# Altium PCB PCB1.PcbDoc
Units mm, origin at the board's own origin, x right, y up, seen from the top; angles counter-clockwise.
Board outline 85.6 x 53.97 mm, 2 copper layers (Top Layer, Bottom Layer), stack 1.97 mm thick; 50 components, 33 nets, 235 pads, 45 vias.
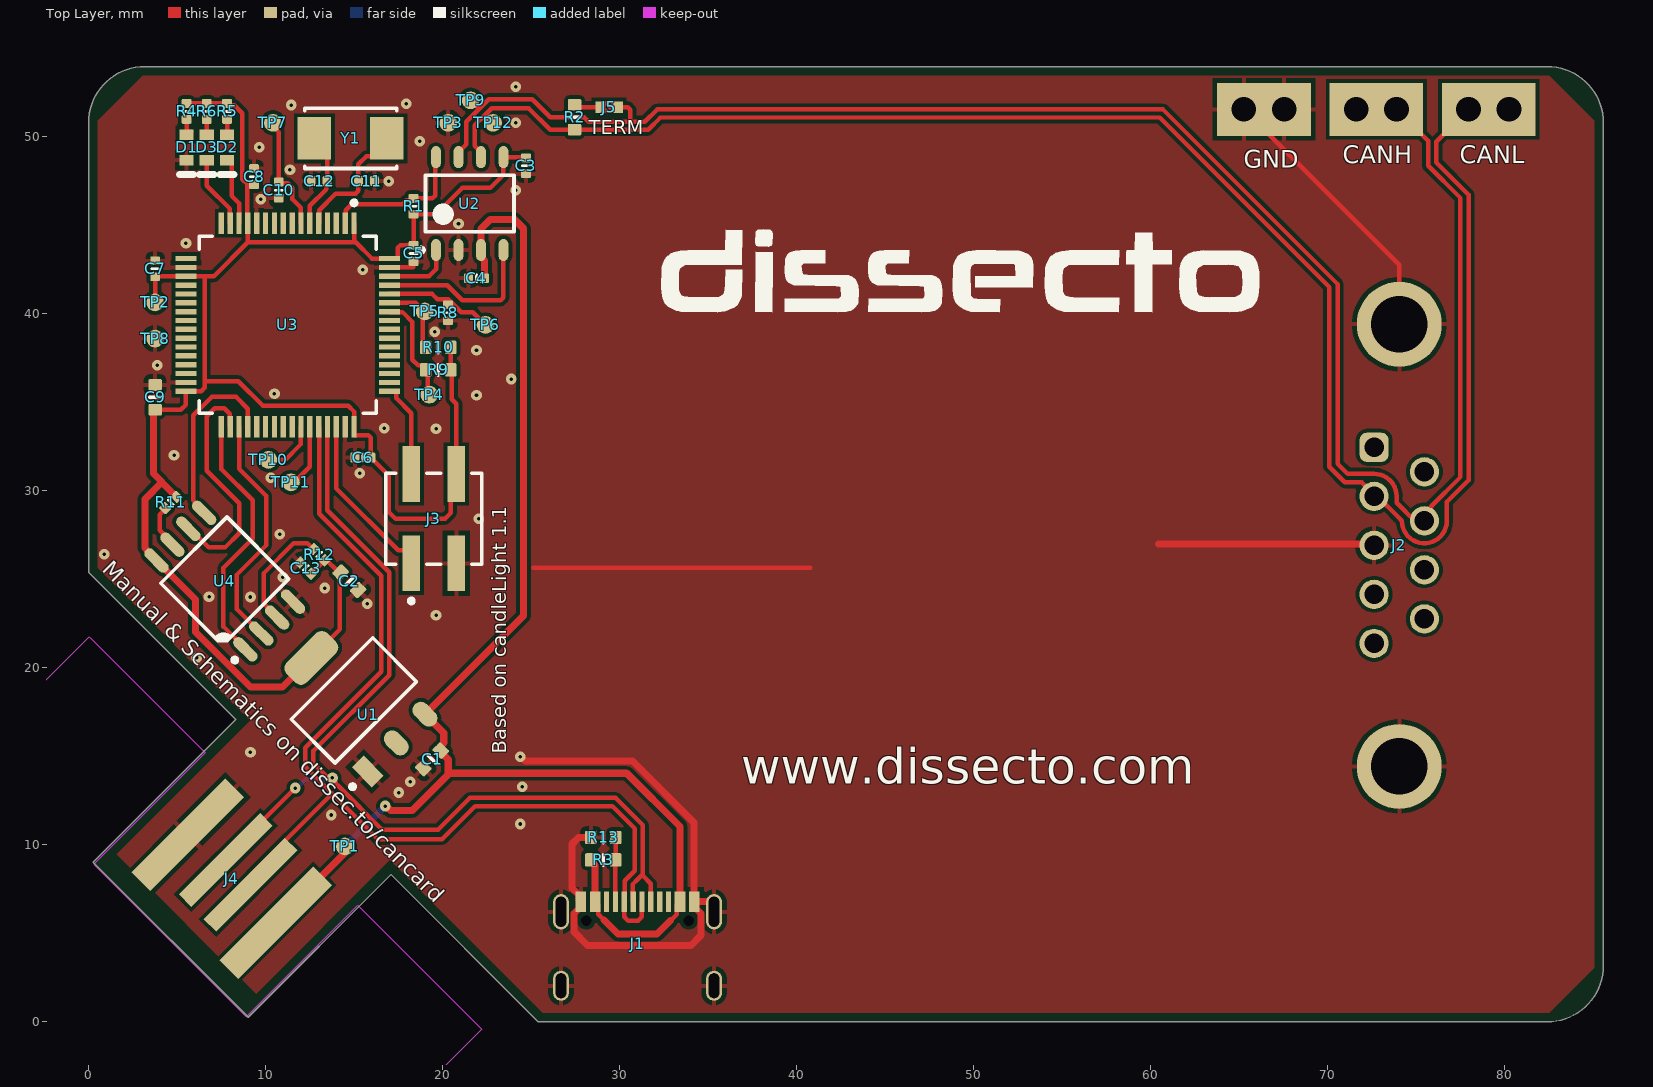
[diagram p0: Top Layer view]
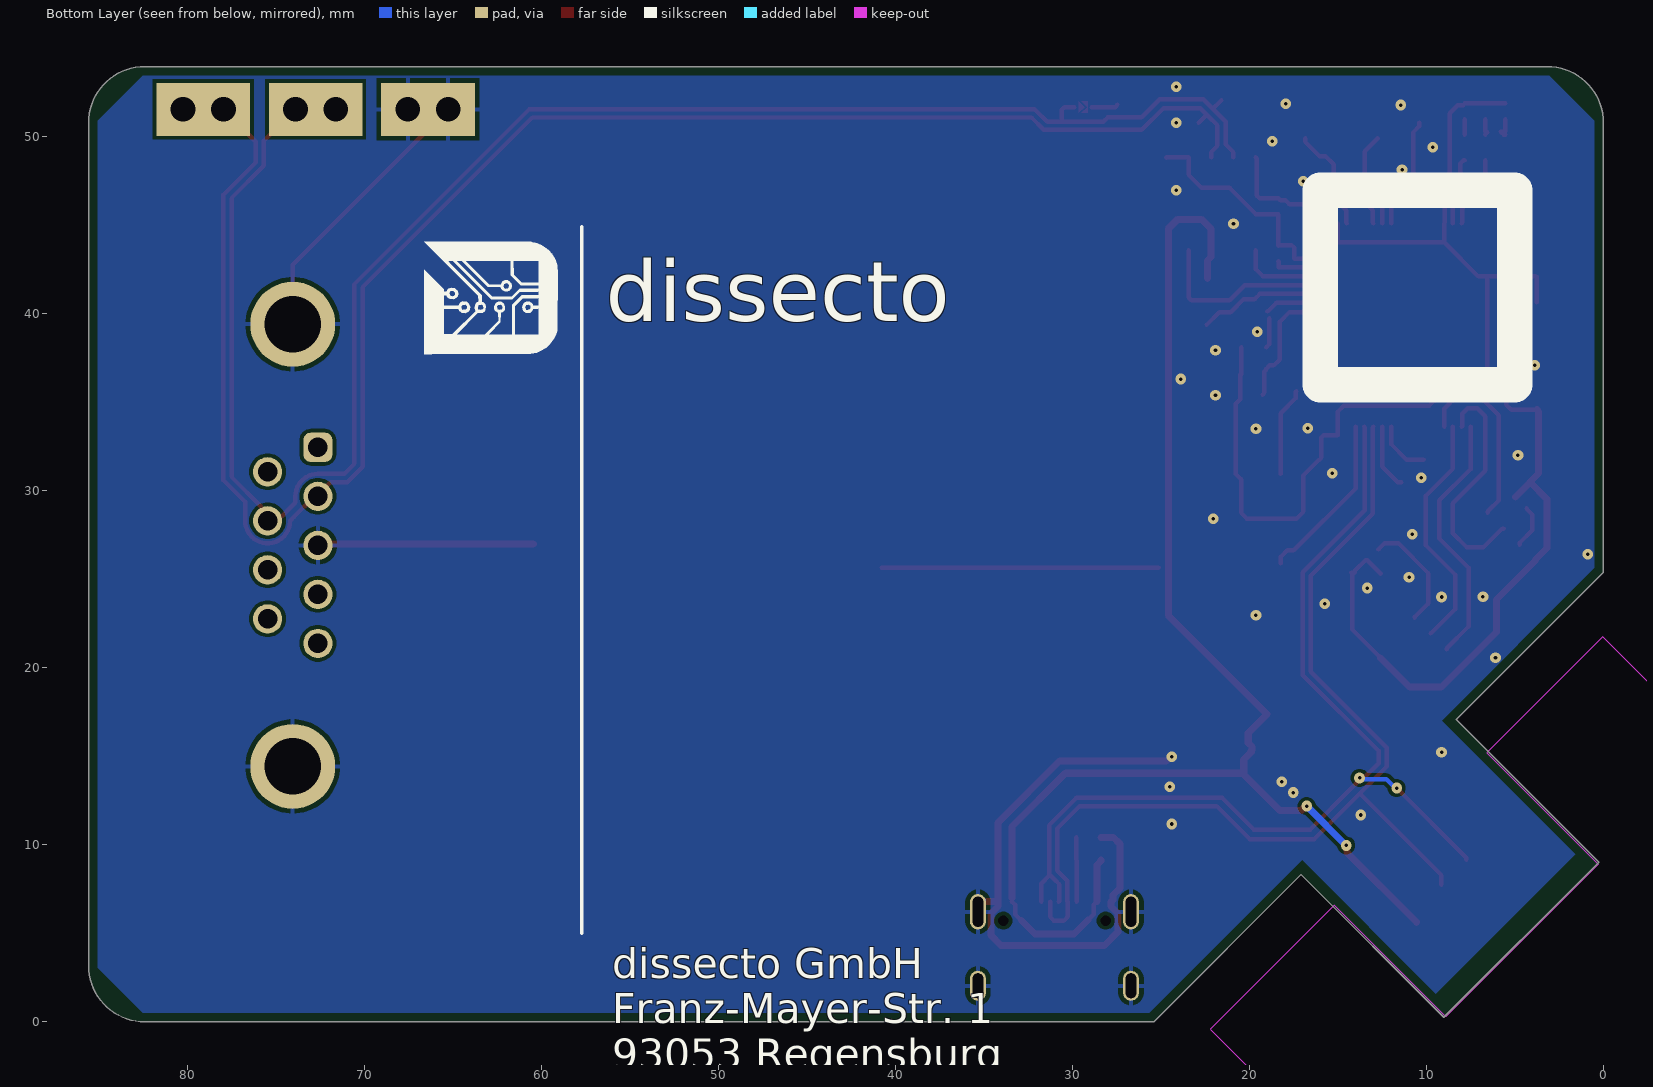
[diagram p1: Bottom Layer view, seen from below]
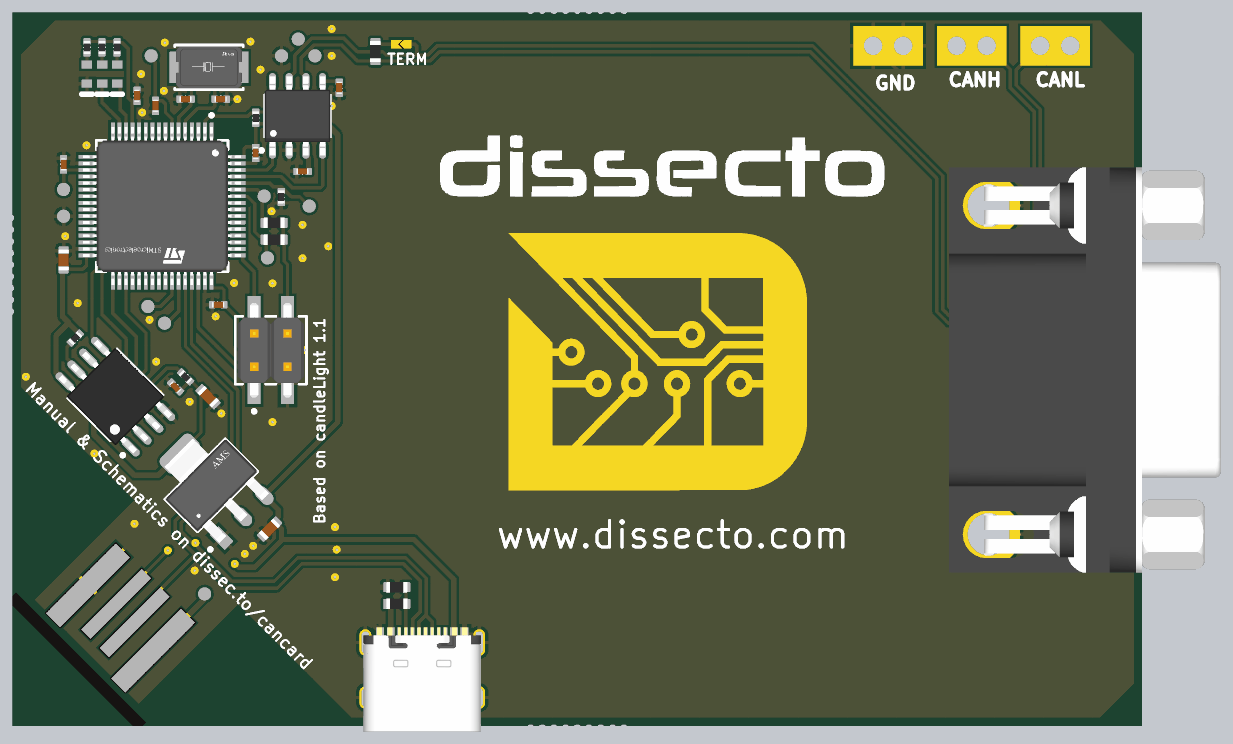
[diagram p2: 3D render of the assembled board from above, using the file's embedded part models]

## Layer stack, top to bottom
Top Solder: solder mask 0.0102, Solder Resist, Dk 3.5
Top Layer: signal copper 0.035
Dielectric 1: dielectric 1.9, FR-4, Dk 4.8
Bottom Layer: signal copper 0.035
Bottom Solder: solder mask 0.0102, Solder Resist, Dk 3.5

## Board outline
9.017,0.254 0.254,9.017 8.319,17.081 0,25.4 0,50.8 cw(c3.175,50.8) 3.175,53.975 82.423,53.975 cw(c82.423,50.8) 85.598,50.8 85.598,3.175 cw(c82.423,3.175) 82.423,0 25.4,0 17.081,8.319

## Design rules (kind name [scope] priority, off if disabled: settings)
Clearance [All] p1: gap=0.2 ignorepadtopadclearanceinfootprint=TRUE
DiffPairsRouting [All] p1: maxlimit=0.254 minlimit=0.2 mostfreqgap=0.254 toplayer_minwidth=0.2 toplayer_maxwidth=0.381 toplayer_prefwidth=0.381 bottomlayer_minwidth=0.2 bottomlayer_maxwidth=0.381 bottomlayer_prefwidth=0.381 maxuncoupledlength=12.7
HoleSize [All] p1: absolutevalues=TRUE maxlimit=100 minlimit=0.025 maxpercent=80.000 minpercent=20.000
MinimumSolderMaskSliver [All] p1: minsoldermaskwidth=0.1
PlaneConnect [All] p1: pad.planeconnectstyle=Relief pad.reliefexpansion=0.508 pad.reliefentries=4 pad.reliefconductorwidth=0.254 pad.reliefairgap=0.254 via.planeconnectstyle=Direct via.reliefexpansion=0.508 via.reliefentries=4 via.reliefconductorwidth=0.254 via.reliefairgap=0.254
PolygonConnect [All] p1: thpad.connectstyle=Relief thpad.reliefconductorwidth=0.254 thpad.reliefentries=4 thpad.polygonreliefangle="90 Angle" thpad.airgapwidth=0.254 smdpad.connectstyle=Relief smdpad.reliefconductorwidth=0.254 smdpad.reliefentries=4 smdpad.polygonreliefangle="90 Angle" smdpad.airgapwidth=0.254 via.connectstyle=Direct via.reliefconductorwidth=0.254 via.reliefentries=4 via.polygonreliefangle="90 Angle" via.airgapwidth=0.254
RoutingVias [All] p1: holewidth=0.711 width=1.27 viastyle="Through Hole" minholewidth=0.711 minwidth=1.27 maxholewidth=0.711 maxwidth=1.27
SilkToSilkClearance [All] p1: silktosilkclearance=0
SilkToSolderMaskClearance [IsPad] p1: minsilkscreentomaskgap=0 clearancetoexposedcopper=TRUE
SolderMaskExpansion [IsVia] p1: expansion=-1000 istentingtop=FALSE
Width [All] p1: maxlimit=2 minlimit=0.254 preferedwidth=0.254 minimp=50.000000 maximp=50.000000 favimp=50.000000
24 further rules are at their usual default settings.

## Classes and differential pairs
differential pair CAN: +CAN_P -CAN_N
differential pair MCU_USB: +MCU_USB_P -MCU_USB_N

## Components (designator, comment, footprint, x,y, rotation, side; value= is the part's Value field where it differs from the comment)
C1 "Capacitor" CAPC0603(1608)100_L 19.404,14.832 r45 top value=10uF
C2 "Capacitor" CAPC0603(1608)100_L 14.732,24.892 r135 top value=10uF
C3 "Capacitor" CAPC0402(1005)33_L 24.712,48.369 r90 top value=100nF
C4 "Capacitor" CAPC0402(1005)33_L 21.918,42.019 r0 top value=100nF
C5 "Capacitor" CAPC0402(1005)33_L 18.362,43.416 r90 top value=100nF
C6 "Capacitor" CAPC0402(1005)33_L 15.503,31.886 r0 top value=100nF
C7 "Capacitor" CAPC0402(1005)33_L 3.757,42.554 r270 top value=100nF
C8 "Capacitor" CAPC0402(1005)33_L 9.345,47.761 r270 top value=100nF
C9 "Capacitor" CAPC0603(1608)100_L 3.757,35.288 r270 top value=10uF
C10 "Capacitor" CAPC0402(1005)33_L 10.742,46.999 r90 top value=100nF
C11 "Capacitor" CAPC0402(1005)33_L 15.695,47.507 r180 top value=20pF
C12 "Capacitor" CAPC0402(1005)33_L 13.025,47.507 r0 top value=20pF
C13 "Capacitor" CAPC0402(1005)33_L 12.266,25.636 r315 top value=100nF
D1 "TLMS1100-GS08" VISH-TLMX1100_V 5.535,49.412 r270 top
D2 "TLMS1100-GS08" VISH-TLMX1100_V 7.821,49.412 r270 top
D3 "TLMS1100-GS08" VISH-TLMX1100_V 6.678,49.412 r270 top
J1 "TYPE-C-31-M-12" TYPE-C-31-M-12-Footprint-1 31.019,6.215 r0 top
J2 "618009231321" 618009231321 78.424,26.924 r90 top
J3 "M20-8760242" FP-M20-8760242-MFG 19.505,28.43 r0 top
J4 "USB A PCB Edge Connector" "USB A PCB Edge Connector-Footprint-1" 4.694,4.69 r315 top
J5 "JUMPER" JUMPER 29.464,51.689 r90 top
R1 "Resistor" RESC0402(1005)_L 18.362,46.083 r270 top value=10k
R2 "Resistor" RESC0603(1608)_L 27.459,51.116 r270 top value=120
R3 "Resistor" RESC0603(1608)_L 29.083,9.144 r0 top value=5.1k
R4 "Resistor" RESC0402(1005)_L 5.535,51.444 r90 top value=1k
R5 "Resistor" RESC0402(1005)_L 7.821,51.444 r90 top value=1k
R6 "Resistor" RESC0402(1005)_L 6.678,51.444 r90 top value=1k
R8 "Resistor" RESC0402(1005)_L 20.307,40.069 r90 top value=1k
R9 "Resistor" RESC0603(1608)_L 19.759,36.839 r0 top value=4.7k
R10 "Resistor" RESC0603(1608)_L 19.759,38.109 r180 top value=4.7k
R11 "Resistor" RESC0402(1005)_L 4.646,29.346 r45 top value=10k
R12 "Resistor" RESC0402(1005)_L 13.028,26.398 r135 top value=10k
R13 "Resistor" RESC0603(1608)_L 29.083,10.414 r0 top
TP1 "Test Point" "New footprint 1"#1 14.478,9.906 r180 top
TP2 "Test Point" "New footprint 1"#1 3.757,40.649 r180 top
TP3 "Test Point" "New footprint 1"#1 20.32,50.8 r90 top
TP4 "Test Point" "New footprint 1"#1 19.251,35.442 r90 top
TP5 "Test Point" "New footprint 1"#1 18.997,40.141 r90 top
TP6 "Test Point" "New footprint 1"#1 22.426,39.379 r90 top
TP7 "Test Point" "New footprint 1"#1 10.414,50.8 r90 top
TP8 "Test Point" "New footprint 1"#2 3.683,38.608 r90 top
TP9 "Test Point" "New footprint 1"#1 21.59,52.07 r90 top
TP10 "Test Point" "New footprint 1"#1 10.16,31.75 r90 top
TP11 "Test Point" "New footprint 1"#1 11.43,30.48 r90 top
TP12 "Test Point" "New footprint 1"#1 22.86,50.8 r90 top
U1 "AMS1117-3.3" FP-AMS1117-IPC_A 14.986,18.161 r135 top
U2 "TJA1051T/3,118" NXP-SOIC-8_L 21.537,46.237 r90 top
U3 "STM32F072RBT6" FP-LQFP64-5W-MFG 11.25,39.379 r270 top
U4 "W25Q128JVSIQ" "WINBOND SOIC-8 208MIL WIDE" 7.694,24.901 r135 top
Y1 "TX50328M2LBCE1T" FP-ABM3-MFG 14.806,49.92 r0 top

## Footprints (in the part's own frame and the unit in brackets; to place one, negate y for a bottom-side part, rotate by r counter-clockwise, add the part's x,y. Pads: shape width x height; smd on the part's side, far side on the other; paste and mask are expansions set on the pad)
618009231321 [mm] "9 pins, right angled, 10.3mm, with hex screw"
  rrect50% 1.65x1.65 hole 1.09: 1(5.54,5.78)
  round 1.65 hole 1.09: 2(2.77,5.78) 3(0,5.78) 4(-2.77,5.78) 5(-5.54,5.78) 6(4.155,2.94) 7(1.385,2.94) 8(-1.385,2.94) 9(-4.155,2.94)
  round 4.8 hole 3.2: M1(-12.495,4.36) M2(12.495,4.36)
  body extent -15.41,-13.28 15.41,7.37, height 12.57
CAPC0402(1005)33_L [mm] "Chip Capacitor, Body 1.0x0.5mm, Height 0.33mm, IPC High Density"
  rrect25% 0.5x0.55 smd: 1(-0.45,0) 2(0.45,0)
  silkscreen extent 0,-0.2 0,0.2, body extent -0.5,-0.25 0.5,0.25, height 0.55
CAPC0603(1608)100_L [mm] "Chip Capacitor, Body 1.6x0.8mm, Height 1.0mm, IPC High Density"
  rrect25% 0.66x0.76 smd: 1(-0.7,0) 2(0.7,0)
  silkscreen extent 0,-0.3 0,0.3, body extent -0.8,-0.4 0.8,0.4, height 0.95
FP-ABM3-MFG [mm]
  rect 1.9x2.4 smd paste+0 mask+0: 1(-2.05,0) 2(2.05,0)
  silkscreen extent -2.6,-1.7 2.6,1.7, body extent -3.1,-1.8 3.1,1.8, height 0.25
FP-AMS1117-IPC_A [mm] "SOT89, 3-Leads, Body 4.5x2.4 mm, Pitch 1.5mm, Lead Span 4.1mm, IPC Low Density"
  rect 1.604x0.952 smd paste+0 mask+0: 1(-3.395,2.29)
  rrect100% 1.604x0.952 smd paste+0 mask+0: 2(-3.395,0) 3(-3.395,-2.29)
  rrect59% 1.604x3.262 smd paste+0 mask+0: 4(3.395,0)
  silkscreen extent -3.52,-3.25 1.75,3.62, body extent -4.7,-3.75 4.7,3.75, height 0.25
FP-LQFP64-5W-MFG [mm]
  rect 1.2x0.3 smd paste+0 mask+0: 1(-5.75,3.75) 2(-5.75,3.25) 3(-5.75,2.75) 4(-5.75,2.25) 5(-5.75,1.75) 6(-5.75,1.25) 7(-5.75,0.75) 8(-5.75,0.25) 9(-5.75,-0.25) 10(-5.75,-0.75) 11(-5.75,-1.25) 12(-5.75,-1.75) 13(-5.75,-2.25) 14(-5.75,-2.75) 15(-5.75,-3.25) 16(-5.75,-3.75) 33(5.75,-3.75) 34(5.75,-3.25) 35(5.75,-2.75) 36(5.75,-2.25) 37(5.75,-1.75) 38(5.75,-1.25) 39(5.75,-0.75) 40(5.75,-0.25) 41(5.75,0.25) 42(5.75,0.75) 43(5.75,1.25) 44(5.75,1.75) 45(5.75,2.25) 46(5.75,2.75) 47(5.75,3.25) 48(5.75,3.75)
  rect 0.3x1.2 smd paste+0 mask+0: 17(-3.75,-5.75) 18(-3.25,-5.75) 19(-2.75,-5.75) 20(-2.25,-5.75) 21(-1.75,-5.75) 22(-1.25,-5.75) 23(-0.75,-5.75) 24(-0.25,-5.75) 25(0.25,-5.75) 26(0.75,-5.75) 27(1.25,-5.75) 28(1.75,-5.75) 29(2.25,-5.75) 30(2.75,-5.75) 31(3.25,-5.75) 32(3.75,-5.75) 49(3.75,5.75) 50(3.25,5.75) 51(2.75,5.75) 52(2.25,5.75) 53(1.75,5.75) 54(1.25,5.75) 55(0.75,5.75) 56(0.25,5.75) 57(-0.25,5.75) 58(-0.75,5.75) 59(-1.25,5.75) 60(-1.75,5.75) 61(-2.25,5.75) 62(-2.75,5.75) 63(-3.25,5.75) 64(-3.75,5.75)
  silkscreen extent -7.02,-5 5,5, body extent -6.45,-6.45 6.45,6.45, height 0.25
FP-M20-8760242-MFG [mm]
  rect 1x3.15 smd paste+0 mask+0: 1(-1.27,-2.525) 2(-1.27,2.525) 3(1.27,-2.525) 4(1.27,2.525)
  silkscreen extent -2.72,-4.77 2.72,2.58, body extent -2.82,-4.2 2.82,4.2, height 0.25
JUMPER [mm]
  rect 0.65x0.55 smd paste-2.54 mask-2.54: 1(0,-0.45) 2(0,0.55)
  Top Layer region: -0.325,-0.175 0.003,0.152 0.325,-0.175
  Top Layer region: -0.325,-0.041 0,0.284 0.325,-0.041 0.325,0.318 -0.325,0.318
"New footprint 1"#1 [mm]
  round 1 smd: 1(0,0)
"New footprint 1"#2 [mm]
  round 1 smd: 1(0,-0.074)
NXP-SOIC-8_L [mm] "SOIC, 8-Leads, Body 5x4mm, Pitch 1.27mm, IPC High Density"
  oval 1.25x0.55 smd: 1(-2.625,1.905) 2(-2.625,0.635) 3(-2.625,-0.635) 4(-2.625,-1.905) 5(2.625,-1.905) 6(2.625,-0.635) 7(2.625,0.635) 8(2.625,1.905)
  silkscreen extent -2.75,-2.5 1.6,2.85, body extent -3,-2.5 3,2.5, height 1.75
RESC0402(1005)_L [mm] "Chip Resistor, Body 1.0x0.5mm, IPC High Density"
  rrect25% 0.5x0.55 smd: 1(-0.45,0) 2(0.45,0)
  silkscreen extent 0,-0.2 0,0.2, body extent -0.5,-0.25 0.5,0.25, height 0.3
RESC0603(1608)_L [mm] "Chip Resistor, Body 1.6x0.8mm, IPC High Density"
  rrect25% 0.66x0.76 smd: 1(-0.7,0) 2(0.7,0)
  silkscreen extent 0,-0.3 0,0.3, body extent -0.8,-0.4 0.8,0.4, height 0.45
TYPE-C-31-M-12-Footprint-1 [mm]
  rect 0.6x1.14 smd: A1(-3.2,0.57) A4(-2.4,0.57) A9(2.4,0.57) A12(3.2,0.57)
  rect 0.3x1.14 smd: A5(-1.25,0.57) A6(-0.25,0.57) A7(0.25,0.57) A8(1.25,0.57) B5(1.75,0.57) B6(0.75,0.57) B7(-0.75,0.57) B8(-1.75,0.57)
  oval 0.9x2 hole 0.6 slot 1.7 at 90 deg: S0(-4.325,0) S2(4.325,0)
  oval 0.9x1.7 hole 0.6 slot 1.4 at 90 deg: S1(-4.325,-4.18) S3(4.325,-4.18)
  round 0 hole 0.6: ""(-2.89,-0.5) ""(2.89,-0.5)
  body extent -4.47,-6.75 4.47,1.15, height 3.21
"USB A PCB Edge Connector-Footprint-1" [mil]
  rect 59.1x295.3 smd paste+0 mask+4: 1(138,189) 4(-138,189)
  rect 39.4x255.9 smd paste+0 mask+4: 2(39,209) 3(-39,209)
  Keep-Out Layer region: -240,345 -240,-5 240,-5 240,345 630,345 630,-465 -605,-465 -605,345
VISH-TLMX1100_V [mm] "SMD, 2-Leads, Body 1.6x0.8mm"
  rect 0.6x0.8 smd: 1(-0.725,0) 2(0.725,0)
  silkscreen extent 1.53,-0.4 1.53,0.4, body extent -0.8,-0.4 0.8,0.4, height 0.65
"WINBOND SOIC-8 208MIL WIDE" [mm] "SOIC, 8-Leads, Body 5.28x5.28mm, Pitch 1.27mm, IPC Medium Density"
  oval 1.7x0.6 smd: 1(-3.55,1.905) 2(-3.55,0.635) 3(-3.55,-0.635) 4(-3.55,-1.905) 5(3.55,-1.905) 6(3.55,-0.635) 7(3.55,0.635) 8(3.55,1.905)
  silkscreen extent -3.67,-2.65 2.47,2.88, body extent -4.01,-2.64 4.01,2.64, height 1.5

## Part data
C1 C2 C3 C4 C5 C6 C7 C8 C9 C10 C11 C12 C13: library part CMP-001-00089-1, "Generic Capacitor", Pins=2
D1 D2 D3: library part CMP-1666-00027-1, "LED, RED, 2.1 V, -40 to 100 degC, 2-Pin SMD (0603), RoHS, Tape and Reel", Capacitance="12 pF", Case Code (Imperial)=0603, Case Code (Metric)=1608, Max Operating Temperature=125degC, Min Operating Temperature=-55degC, Package Quantity=4000, Resistance="100000000000 Ohm", Tolerance=5%, Type (Capacitors)=C0G, Voltage Rating="50 V", Case/Package=0603, ComponentLink1Description="Manufacturer URL", ComponentLink1URL=http://www.vishay.com/, ComponentLink2Description=Datasheet, ComponentLink2URL=http://www.vishay.com/docs/83173/tlmb1100.pdf, DatasheetVersion="Rev. 2.7, 03/2016", Height="0.8 mm", Length="1.6 mm", Mount="Surface Mount", PackageDescription="2-Pin Surface Mount Device, Body 1.6 x 0.8 mm", PackageReference=TLMX1100, Packaging="Tape and Reel", Pins=2, Radiation Hardening=No, REACH SVHC="No SVHC", RoHSCompliant=True, Voltage Rating (DC)="50 V", Width="0.8 mm"
J1: library part CMP-002-00095-1, "USB Type C USB 2.0", Max Current Rating=5A, Connector Type="USB Type C", Gender=Female, Mounting Technology=SMD, Pins=16
J2: library part CMP-1502-00204-2, Contact Resistance=30mΩ, Current Rating=3A, Insulation Resistance=5GΩ, Max Operating Temperature=105°C, Min Operating Temperature=-55°C, Operating Supply Voltage=125V, Contact Plating=Gold, Depth=20.75mm, Gender=Female, Housing Material=Steel, Insulation Material=PBT, Lead Free="Lead Free", Length=16.34mm, Mount="Through Hole", NexarPartId=12259390, Number Of Contacts=9, Number of Pins=9, Number Of Rows=2, Orientation="Right Angle", Pitch=2.77mm, REACH SVHC=Unknown, RoHS=Compliant, Termination=SMD/SMT, Voltage Rating=125V, Width=12.5mm
J3: library part CMP-15831-000048-1, "CONN HEADER SMD 4POS 2.54MM", Color=Black, Contact Resistance=25mR, Max Current Rating=3A, Max Operating Temperature=105°C, Min Operating Temperature=-40°C, Package Quantity=1000, Connector Type="Male Pin", Contact Material=Bronze, Contact Mating Length=0.228inch, Contact Plating=Gold, Contact Type="Male Pin", Depth=5.08mm, Gender=Male, Housing Color=Black, Housing Material=Nylon, Length=5.08mm, Mount="Surface Mount", Number Of Contacts=4, Number of Positions=4, Number Of Rows=2, Orientation=Straight, Packaging=Bulk, Pitch=2.54mm, Radiation Hardening=No, RoHS Compliant=Yes, Row Spacing=0.1inch, Series=M20, Termination=Solder
J4: library part CMP-002-00096-1
J5: library part CMP-009-00061-2, Pins=2
R1 R2 R3 R4 R5 R6 R8 R9 R10 R11 R12 R13: library part CMP-009-00196-1, "Generic Resistor", Pins=2
TP1 TP2 TP3 TP4 TP5 TP6 TP7 TP8 TP9 TP10 TP11 TP12: library part CMP-000000-1
U1: library part CMP-209535-000001-1, "LDO Voltage Regulators 1A, 3.3V", Dropout Voltage=1.1V, Manufacturer="Advanced Monolithic Systems", Max Junction Temp=+125°C, Max Power Dissipation=1.2W, Max Supply Voltage=15V, Nominal Supply Current=5mA, Output Current=1A, Output Voltage=3.3V, Package=AMS1117, Temperature="-40°C to +125°C", Temperature Range Low=-40°C, Automotive=No, Category=IC, ComponentLink2Description=Datasheet, ComponentLink2URL=http://www.advanced-monolithic.com/pdf/ds1117.pdf, Device Class L1="Integrated Circuits (ICs)", Device Class L2="Power Management ICs", Device Class L3="Voltage Regulators - Linear", Height=1.8mm, Ipc Land Pattern Name=SOT229P700X180-4, Lead Free=Yes, Manufacturer Part Number=AMS1117-3.3, Number Of Outputs=1, Octopart=https://octopart.com/ams1117-3.3-advanced+monolithic+systems-25899300, Output Type=Fixed, RoHS=TRUE, Standoff Height=0.64mm, Temperature Range High=+125°C
U2: library part CMP-2000-07245-1, "High-Speed CAN Transceiver, 3 to 5 V, 8-Pin SOIC (SOT96-1), RoHS, Tape and Reel", Manufacturer=NXP, Operating Supply Voltage (Max)=5.5V, Operating Supply Voltage (Min)=4.5V, Operating Supply Voltage (Typ)=5V, Operating Temperature (Max)=125C, Operating Temperature (Min)=-40C, Operating Temperature Classification=Automotive, Package Description="8-Pin Small Outline Integrated Circuit, Body 4.9 x 3.9 mm, Pitch 1.27 mm", Package Reference=SOT96-1, Package Type=SO, Power Down Mode=Normal/Silent, Supply Current=70mA, Category=Transceiver, Data Rate=1Mbps, Datasheet URL=http://www.nxp.com/documents/data_sheet/TJA1051.pdf, Datasheet Version="Rev. 7, 01/2015", DELETED=Compliant, Manufacturer URL=http://www.nxp.com/, Mounting=SurfaceMount, Mounting Technology=SurfaceMount, Number of Transceivers=1, Packaging=TapeandReel, Pin Count=8, Rad Hardened=No, Standard Supported=ISO11898-2
U3: library part CMP-0304-00181-3, "IC MCU 32BIT 128KB FLASH 64LQFP", Ambient Temperature Range High=+85°C, Ambient Temperature Range Low=-40°C, Frequency=48MHz, Manufacturer=STMicroelectronics, Max Junction Temp=+105°C, Max Supply Voltage=3.6V, Min Supply Voltage=1.65V, Package=LQFP64-5W, Temperature="-40°C to +105°C", Automotive=No, Category=IC, ComponentLink2Description=Datasheet, ComponentLink2URL=https://www.st.com/resource/en/datasheet/stm32f072rb.pdf, Core Architecture="ARM Cortex-M0", Data Bus Width=32bits, Device Class L1="Integrated Circuits (ICs)", Device Class L2="Embedded Processors and Controllers", Device Class L3=Microcontrollers, Digikey Description="IC MCU 32BIT 128KB FLASH 64LQFP", Height=1.6mm, Interface=I2C,SPI,USART,CAN,USB,LIN,IrDA,I2S,Other, Lead Free=Yes, Manufacturer Part Number=STM32F072RBT6, Memory Size=128KBytes, Memory Type=FLASH, Mouser Description="ARM Microcontrollers - MCU 16/32-BITS MICROS", Number Of A/D Converters=1, Number Of Adc Channels=19, Number Of Cores=1, Number Of I2C Channels=2, Number Of I/Os=51, Number Of Pwm Channels=18, Number Of Spi Channels=2, Number Of Timers/Counters=9, Number Of Uart Channels=4, Number Of Usb Channels=1, Octopart=https://octopart.com/stm32f072rbt6-stmicroelectronics-34084849, RAM Size=16KBytes, RoHS=TRUE, Standoff Height=0.05mm, Temperature Range High=+105°C, Temperature Range Low=-40°C
U4: library part CMP-019-00063-1, "Flash, 16MX8, PDSO8", Case/Package=SOP, Clock Frequency=133MHz, Max Operating Temperature=85°C, Max Supply Voltage=3.6V, Min Operating Temperature=-40°C, Min Supply Voltage=3V, Memory Format=FLASH, Memory Size=16777216, Pins=8, RoHS Compliant=Yes
Y1: library part CMP-003-00031-1, Case/Package="GLASS 5.0*3.22PIN", Frequency=8MHz, Mounting Technology=SMD, Pins=2

## Free pads (board coordinates)
  rect 3x3 hole 1.4: 2(65.278,51.562) 2(71.628,51.562) 3(67.564,51.562) 3(73.914,51.562) 4(77.978,51.562) 5(80.264,51.562)
  round 0 hole 0.6 unplated paste-2539.97 mask+0: 4(-0.3,31.369) 4(-0.3,32.258) 4(-0.3,33.147) 4(-0.3,34.036) 4(-0.3,34.925) 4(-0.3,35.814) 4(-0.3,36.703) 4(-0.3,37.592) 4(-0.3,38.481) 4(39.243,-0.3) 4(39.243,54.275) 4(40.132,-0.3) 4(40.132,54.275) 4(41.021,-0.3) 4(41.021,54.275) 4(41.91,-0.3) 4(41.91,54.275) 4(42.799,-0.3) 4(42.799,54.275) 4(43.688,-0.3) 4(43.688,54.275) 4(44.577,-0.3) 4(44.577,54.275) 4(45.466,-0.3) 4(45.466,54.275) 4(46.355,-0.3) 4(46.355,54.275) 4(85.898,31.496) 4(85.898,32.385) 4(85.898,33.274) 4(85.898,34.163) 4(85.898,35.052) 4(85.898,35.941) 4(85.898,36.83) 4(85.898,37.719) 4(85.898,38.608)

## Via types
v1: diameter 0.6, hole 0.2, Top Layer to Bottom Layer, 45 vias

## Nets (pads, with @x,y where several pads share a name; then routed paths per layer and width w, separated by ;. In a path a pad name is that pad's centre, name@x,y a point inside that pad or via, vN(x,y) a via of type N, cw(c..) or ccw(c..) an arc to the next point about the centre after c; other vN are vias at no path point)
+3.3: C2.2 C3.2 C5.2 C6.2 C7.2 C8.2 C9.2 C13.2 J3.4 R1.2 R4.2 R5.2 R6.2 R9.2 R10.1 R11.2 R12.1 TP2.1 U1.4 U2.5 U3.1 U3.13 U3.19 U3.32 U3.48 U3.64 U4.8 | length 111.5
  Top Layer w0.254: C9.2 5.21,34.588 5.5,34.877 U3.32 6.357,35.629 6.551,35.823 6.551,36.204 ; TP2.1 C7.2@3.757,42.024 ; C7.2 C7.2@3.757,42.024 ; R4.2 R6.2 R5.2 7.924,51.79 8.236,51.79 8.678,51.348 8.678,47.609 8.977,47.311 ; 6.551,42.104 6.551,36.204 ; 7.082,42.129 U3.19 3.861,42.129 C7.2@3.757,42.024 ; 7.1,42.147 9,44.047 ; C8.2 8.977,47.311 ; C13.2 R12.1 13.445,26.08 14.044,25.481 14.044,25.392 C2.2@14.039,25.387 ; U1.4 14.202,22.178 14.202,25.224 C2.2@14.039,25.387 ; C2.2 C2.2@14.039,25.387 ; U3.1@15.016,45.112 15.016,44.047 ; R9.2@20.459,36.601 R9.2 20.459,37.587 R10.1 ; R9.2@20.521,36.57 20.521,35.188 20.775,34.934 J3.4 20.476,30.657 20.476,28.767 20.14,28.43 17.346,28.43 16.965,28.811 16.965,30.875 16.101,31.738 16.076,31.738 15.953,31.861 C6.2 15.953,33.007 15.805,33.156 15.023,33.156 15,33.179 U3.48 15,34.486 14.679,34.807 9.853,34.807 8.456,36.204 6.551,36.204 ; C3.2 24.669,48.862 U2.5 23.442,47.861 22.707,47.126 21.123,47.126 19.63,45.633 R1.2 C5.2 18.335,43.893 17.621,43.893 17.473,43.744 17.473,43.152 17.45,43.129 U3.64 16.009,43.129 15.091,44.047 15.016,44.047 ; 8.977,47.311 8.977,45.152 U3.13 9,44.047 ; 9,44.047 15.016,44.047
  Top Layer w0.4: C9.2 3.666,34.497 3.666,30.992 4.153,30.505 3.175,29.526 3.175,26.78 3.836,26.118 U4.8 6.043,23.858 6.043,22.024 9.144,18.923 10.947,18.923 U1.4 ; 4.267,30.361 R11.2
+5: C1.2 C4.2 J1.A4 J1.A9 J4.1 R3.1 TP1.1 U1.3 U2.3 | length 81.2
  Top Layer w0.254: J1.A4 28.792,6.612 28.792,6.193 28.792,6.08 29.12,5.752 ; 32.887,5.721 33.246,6.08 33.246,6.193 33.246,6.612 J1.A9
  Top Layer w0.4: J4.1 10.567,5.636 14.478,9.547 TP1.1 ; TP1.1@14.593,10.021 v1(14.535,9.963) ; v1(16.764,12.192) 16.818,12.192 17.072,11.938 18.288,11.938 20.32,13.97 20.32,14.824 19.899,15.246 C1.2 19.863,15.362 19.863,15.546 20.066,15.749 20.066,16.32 U1.3 24.585,22.958 24.585,44.813 24.05,45.348 22.707,45.348 22.172,44.813 U2.3 22.172,43.221 22.368,43.025 C4.2 ; 20.32,14.045 30.405,14.045 33.419,11.031 J1.A9@33.419,7.003 ; R3.1 28.383,9.094 28.619,8.858 J1.A4 ; 29.12,5.752 29.919,4.953 32.119,4.953 32.887,5.721 ; TP1.1 v1(14.535,9.963) ; TP1.1 14.478,9.963 v1(14.535,9.963)
  Bottom Layer w0.4: v1(14.535,9.963) v1(16.764,12.192)
CAN_N: J2.2 pad.4@77.978,51.562 pad.5 R2.2 TP12.1 U2.6 | length 100.9
  Top Layer w0.254: U2.6 22.172,49.144 21.807,49.509 21.807,50.66 22.404,51.256 ; TP12.1 22.404,51.256 ; R2.2@27.465,50.41 26.078,50.41 24.861,51.627 22.774,51.627 22.404,51.256 ; R2.2@27.468,50.407 31.618,50.407 32.312,51.101 60.525,51.101 70.104,41.522 70.104,31.362 70.986,30.48 71.935,30.48 72.644,29.771 J2.2 72.829,29.694 73.988,28.535 74.214,28.309 ccw(c75.484,28.309) 76.754,28.309 76.754,29.376 77.978,30.6 77.978,46.736 76.152,48.562 76.152,49.736 pad.4@77.978,51.562
CAN_P: J2.7 J5.1 pad.2@71.628,51.562 pad.3@73.914,51.562 TP9.1 U2.7 | length 101
  Top Layer w0.254: U2.7 20.902,49.144 21.336,49.579 21.336,50.855 22.069,51.588 ; TP9.1 21.59,52.066 22.069,51.588 ; J5.1 30.458,51.689 30.607,51.54 30.607,50.861 ; pad.3@74.168,51.308 75.698,49.778 75.698,48.374 77.524,46.548 77.524,30.788 75.863,29.127 75.863,29.066 75.484,28.687 J2.7 75.239,28.554 74.688,28.554 74.199,29.043 73.914,29.327 73.914,29.694 ccw(c72.644,29.694) 72.644,30.964 71.144,30.964 70.576,31.532 70.576,41.692 60.713,51.555 32.124,51.555 31.43,50.861 30.607,50.861 ; 22.069,51.588 22.579,52.098 22.616,52.135 25.071,52.135 26.084,51.122 27.996,51.122 28.257,50.861 30.607,50.861
CAN_RX: U2.4 U3.61 | length 9.5
  Top Layer w0.254: U3.61 20.269,41.629 21.122,40.776 23.293,40.776 23.442,40.925 U2.4
CAN_S: R1.1 U2.8 U3.2 | length 8.3
  Top Layer w0.254: U3.2 14.523,45.152 14.523,45.864 14.868,46.21 17.743,46.21 17.96,46.426 18.255,46.426 R1.1 19.425,46.533 19.574,46.682 19.574,48.245 19.575,48.246 19.575,48.805 U2.8
CAN_TX: U2.1 U3.62 | length 3.9
  Top Layer w0.254: U3.62 19.235,42.129 19.632,42.526 U2.1
GND: C1.1 C2.1 C3.1 C4.1 C5.1 C6.1 C7.1 C8.1 C9.1 C10.1 C11.1 C12.1 C13.1 D1.2 J1.A1 J1.A12 J1.S0 J1.S1 J1.S2 J1.S3 J2.3 J2.M1 J2.M2 J3.3 J4.4 pad.2@65.278,51.562 pad.3@67.564,51.562 R8.1 R13.1 TP3.1 TP8.1 U1.1 U2.2 U3.12 U3.18 U3.31 U3.47 U3.63 U4.4 | length 83
  Top Layer w0.254: U3.63 18.354,42.629 18.354,42.958 C5.1 ; 25.112,25.654 40.767,25.654 ; J1.S2@35.046,6.785 35.344,6.487 J1.S2 ; pad.2@66.248,50.189 65.278,51.159 65.278,51.562 74.064,42.776 J2.M2
  Top Layer w0.4: v1(24.384,14.986) 24.438,14.986 24.692,14.732 30.734,14.732 34.219,11.247 J1.A12 ; J1.S0 J1.S0@26.694,6.9 ; R13.1 27.686,10.414 27.305,10.033 27.305,7.569 27.719,7.155 27.719,6.885 J1.A1 27.819,6.515 27.429,6.125 27.429,5.083 28.194,4.318 34.036,4.318 34.609,4.891 34.609,6.125 34.219,6.515 J1.A12 ; J1.S2@35.046,6.785 J1.A12 ; 60.452,26.987 J2.3@72.644,26.987
  Bottom Layer w0.254: J1.S0@26.663,6.223 26.663,6.56 J1.S0@26.961,6.858 ; J1.S2@35.015,6.858 35.313,6.56 J1.S2@35.313,6.223
  other v1: 24.384,11.176 13.716,11.684 17.526,12.954 24.511,13.273 18.167,13.562 9.144,15.24 6.096,20.574 19.632,22.969 15.748,23.622 6.805,24.012 9.144,24.003 13.335,24.511 10.981,25.127 0.889,26.416 10.795,27.559 22.045,28.43 10.287,30.734 15.314,30.997 4.826,32.004 19.632,33.51 16.711,33.537 21.918,35.415 10.5,35.5 23.876,36.322 3.884,37.093 21.918,37.955 19.563,38.985 15.5,42.5 5.5,44 20.902,45.094 9.726,46.491 24.13,46.99 16.965,47.507 11.377,48.142 9.649,49.416 18.72,49.75 24.13,50.8 11.449,51.806 17.956,51.882 24.129,52.845
MCU_BOOT0: R8.2 TP6.1 U3.60 | length 6.2
  Top Layer w0.254: U3.60 19.406,41.129 19.694,40.84 20.322,40.84 21.064,40.098 21.706,40.098 TP6.1
MCU_LED1: D2.2 U3.14 | length 3.9
  Top Layer w0.254: D2.2 7.902,48.687 8.075,48.514 8.075,46.683 8.5,46.258 U3.14
MCU_LED2: D3.2 U3.15 | length 4.1
  Top Layer w0.254: D3.2 6.678,47.253 7.977,45.954 7.977,45.152 U3.15
MCU_NRST: C10.2 TP7.1 U3.7 | length 6.5
  Top Layer w0.254: TP7.1 10.414,50.598 10.733,50.279 10.733,47.457 C10.2 ; C10.2@10.808,47.383 11.247,47.383 11.504,47.126 11.504,46.491 12,45.995 U3.7
MCU_USB_N: J1.A7 J1.B7 J4.2 U3.44 | length 58.4
  Top Layer w0.254: J4.2 9.148,8.271 13.716,12.839 13.716,12.954 ; U3.44 13.023,33.606 13.023,28.714 16.529,25.208 16.529,19.772 12.246,15.49 12.246,14.424 13.151,13.519 16.344,10.326 19.978,10.326 20.282,10.63 21.844,12.192 29.591,12.192 30.873,10.91 30.873,8.552 30.859,8.538 30.859,8.532 30.3,7.973 30.296,7.969 30.296,7.494 30.292,7.49 30.292,7.348 30.292,6.808 J1.B7 30.269,5.926 30.48,5.715 31.049,5.715 31.269,5.935 J1.A7
MCU_USB_P: J1.A6 J1.B6 J4.3 U3.45 | length 58.2
  Top Layer w0.254: J4.3 7.747,9.271 v1(11.684,13.208) ; U3.45 13.477,33.606 13.477,33.11 13.477,28.902 16.983,25.396 16.983,19.584 12.7,15.301 12.7,14.612 13.467,13.845 13.712,13.845 v1(13.778,13.778) ; v1@13.716,13.747 13.951,13.512 13.951,13.481 14.154,13.278 16.568,10.864 19.754,10.864 21.536,12.646 29.779,12.646 31.327,11.098 31.327,8.344 ; J1.A6 30.755,6.799 30.755,7.778 30.759,7.783 31.007,8.03 ; 31.008,8.03 31.322,8.344 31.327,8.344 ; J1.B6 31.769,7.802 31.327,8.244 31.327,8.344
  Bottom Layer w0.254: v1(11.684,13.208) 11.763,13.208 12.271,13.716 13.716,13.716 v1(13.778,13.778)
NetC11_2: C11.2 U3.5 Y1.2 | length 7.2
  Top Layer w0.254: U3.5 13.023,45.152 13.023,45.722 13.023,45.864 13.962,46.804 15.088,46.804 15.245,46.961 15.245,48.454 15.693,48.902 16.033,48.902 16.856,49.725 Y1.2
NetC12_2: C12.2 U3.6 Y1.1 | length 5.5
  Top Layer w0.254: U3.6 12.5,46.11 13.426,47.037 13.426,47.458 C12.2 13.475,49.2 Y1.1
NetD1_1: D1.1 R4.1 | length 1.3
  Top Layer w0.254: D1.1 5.635,50.137 5.735,50.237 5.808,50.31 5.535,50.31 R4.1
NetD2_1: D2.1 R5.1 | length 0.9
  Top Layer w0.254: D2.1 R5.1
NetD3_1: D3.1 R6.1 | length 1
  Top Layer w0.254: D3.1 6.551,50.264 6.632,50.264 6.678,50.31 R6.1
NetJ1_A5: J1.A5 R3.2 R13.2 | length 3.6
  Top Layer w0.254: J1.A5 29.769,9.13 R3.2 R13.2
NetJ5_2: J5.2 R2.1 | length 1.5
  Top Layer w0.254: R2.1 27.586,51.689 J5.2
NetR9_1: R9.1 TP4.1 U3.58 | length 6.2
  Top Layer w0.254: U3.58 17.023,40.106 17.593,40.106 17.735,40.106 18.296,39.545 18.296,37.413 18.617,37.092 18.855,37.092 19.059,36.889 R9.1 19.155,36.743 19.155,35.538 TP4.1
NetR10_2: R10.2 TP5.1 U3.59 | length 3.9
  Top Layer w0.254: U3.59 18.475,40.629 18.963,40.141 TP5.1 ; TP5.1@18.867,39.763 18.867,38.301 R10.2
NetR11_1: R11.1 U4.7 | length 2.5
  Top Layer w0.254: R11.1 4.327,28.979 4.011,28.663 4.011,27.78 4.734,27.056 U4.7
NetR12_2: R12.2 U4.3 | length 6.5
  Top Layer w0.254: U4.3 10.653,22.877 9.906,23.624 9.906,25.359 11.598,27.051 12.362,27.051 12.697,26.716 R12.2
NetTP10_1: TP10.1 U3.42 | length 3.2
  Top Layer w0.254: TP10.1 11.102,31.75 12,32.648 U3.42
NetTP11_1: TP11.1 U3.43 | length 3.7
  Top Layer w0.254: TP11.1 11.613,30.48 12.5,31.367 U3.43
SPI2_MISO: U3.35 U4.2 | length 13.6
  Top Layer w0.254: U3.35 8.5,31.251 10.024,29.727 10.024,26.915 8.382,25.273 8.382,23.315 U4.2
SPI2_MOSI: U3.36 U4.5 | length 10.6
  Top Layer w0.254: U4.5 6.53,28.852 5.92,29.462 5.92,34.269 6.966,35.315 8.329,35.315 9,34.644 U3.36
SPI2_NSS: U3.33 U4.1 | length 14.5
  Top Layer w0.254: U3.33 7.5,31.235 9.271,29.464 9.271,27.305 7.62,25.654 7.62,22.336 8.857,21.099 U4.1
SPI2_SCK: U3.34 U4.6 | length 13.4
  Top Layer w0.254: U4.6 5.726,27.86 6.78,26.806 7.708,26.806 8.509,27.607 8.509,29.31 6.681,31.138 6.681,34.219 7.133,34.672 7.669,34.672 7.977,34.364 7.977,33.652 U3.34
SWCLK: J3.2 U3.49 | length 5
  Top Layer w0.254: U3.49@17.359,35.629 17.382,35.606 17.382,35.247 18.235,34.394 J3.2
SWDIO: J3.1 U3.46 | length 9.7
  Top Layer w0.254: U3.46 14,30.14 17.502,26.637 17.862,26.637 18.22,26.279 J3.1@18.22,25.92
pads on no net: J1. J1.A8 J1.B5 J1.B8 J2.1 J2.4 J2.5 J2.6 J2.8 J2.9 U1.2 U3.3 U3.4 U3.8 U3.9 U3.10 U3.11 U3.16 U3.17 U3.20 U3.21 U3.22 U3.23 U3.24 U3.25 U3.26 U3.27 U3.28 U3.29 U3.30 U3.37 U3.38 U3.39 U3.40 U3.41 U3.50 U3.51 U3.52 U3.53 U3.54 U3.55 U3.56 U3.57

## Polygon pours and split planes (outlines as drawn)
GND on Bottom Layer "GND_L02_P003" (solid, remove dead copper, pour order 3): 0.508,50.927 3.048,53.467 82.55,53.467 85.09,50.927 85.09,3.048 82.55,0.508 25.654,0.508 17.018,9.144 9.461,1.587 1.587,9.461 9.144,17.018 0.508,25.654
no net on Bottom Solder (solid): 0.127,10.033 10.033,0.127 9.398,-0.508 -0.508,9.398
no net on Top Solder (solid): 0.127,10.033 10.033,0.127 9.398,-0.508 -0.508,9.398
GND on Top Layer "GND_L01_P006" (solid, remove dead copper, pour order 6): 0.508,50.927 3.048,53.467 82.55,53.467 85.09,50.927 85.09,3.048 82.55,0.508 25.654,0.508 17.018,9.144 9.461,1.587 1.587,9.461 9.144,17.018 0.508,25.654

## Silkscreen, mask and mechanical layers (free items; w line width, h text height)
Top Overlay:
  drawing of 9 lines, arcs and shapes, not listed
  text "TERM" at 28.268,50.167 h0.8
  text "CANH" at 70.866,48.514 h1
  text "CANL" at 77.47,48.514 h1
  text "GND" at 65.278,48.26 h1
  text "Manual & Schematics on dissec.to/cancard" at 0.72,25.527 h0.9 r315
  text "Based on candleLight 1.1" at 23.586,15.136 h0.8 r90
  text "www.dissecto.com" at 36.88,13.458 h2
Bottom Overlay:
  region: 85 vertices and 10 holes, not listed, extent 59.083,37.724 66.644,44.088
  lines w0.2: 57.727,5 57.727,44.921
  lines w2: 5,36 16,36 16,47 5,47 5,36
  text "dissecto" at 56.388,38.465 h5.9
  text "dissecto GmbH / Franz-Mayer-Str. 1 / 93053 Regensburg / Germany" at 56,-5.194 h1.7
Top Solder:
  region: 275 vertices and 10 holes, not listed, extent 37.574,17.784 60.264,37.319
Route Tool Path:
  lines w2: -1,30 -1,25.4 ; -1,40 -1,50.8 cw(c3.175,50.8) 3.175,54.975 37.799,54.975 ; 37.799,-1 25.4,-1 ; 47.799,-1 82.423,-1 ccw(c82.423,3.175) 86.598,3.175 86.598,30 ; 47.799,54.975 82.423,54.975 cw(c82.423,50.8) 86.598,50.8 86.598,40 ; -1,25.4 ccw(c0,25.4) -0.707,24.693 ; -1,25.4 ccw(c0,25.4) -0.707,24.693 ; -0.707,24.693 6.904,17.081 -0.453,9.724 ; -0.453,8.31 cw(c0.254,9.017) -0.453,9.724 ; -0.453,8.31 cw(c0.254,9.017) -0.453,9.724 ; -0.453,8.31 8.31,-0.453 ; 8.31,-0.453 ccw(c9.017,0.254) 9.724,-0.453 ; 8.31,-0.453 ccw(c9.017,0.254) 9.724,-0.453 ; 9.724,-0.453 17.081,6.904 24.693,-0.707 ; 24.693,-0.707 ccw(c25.4,0) 25.4,-1 ; 24.693,-0.707 ccw(c25.4,0) 25.4,-1
Board Shape:
  lines w0.254: 0,25.4 0,50.673 0,50.8 cw(c3.175,50.8) 3.175,53.975 7.112,53.975 82.423,53.975 cw(c82.423,50.8) 85.598,50.8 85.598,3.175 cw(c82.423,3.175) 82.423,0 79.502,0 25.4,0 17.081,8.319 9.017,0.254 0.254,9.017 8.319,17.081 0,25.4

## Dimensions
0.254,9.017 to 9.017,0.254 on Mechanical 1
17.081,8.319 to 9.144,0.127 on Mechanical 1

## Text inside footprints (layer, text, board x,y; h text height)
J2: Mechanical 2 "PCB Edge" at 87.224,28.724 h1.02 r90